# Altium PCB CAN_BUS.PcbDoc
Units mil, origin at the board's own origin, x right, y up, seen from the top; angles counter-clockwise.
Board outline 1210 x 1405 mil, 2 copper layers (Top Layer, Bottom Layer); 16 components, 15 nets, 59 pads, 0 vias.
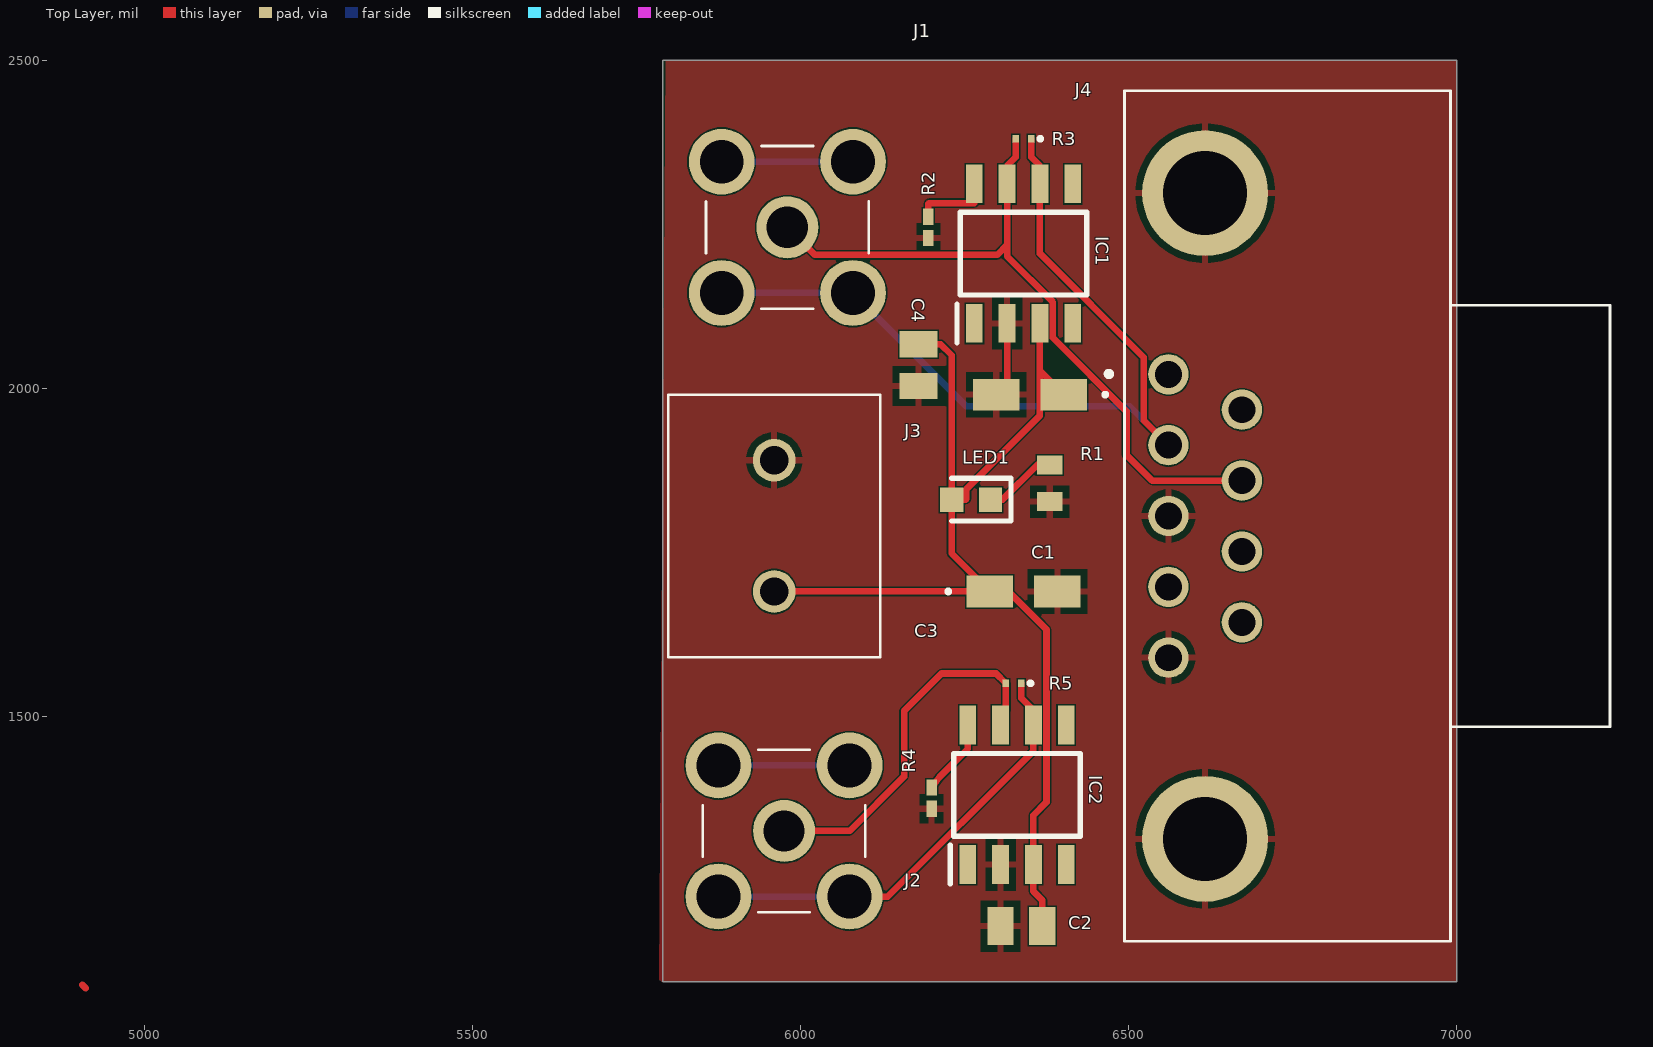
[diagram p0: Top Layer view]
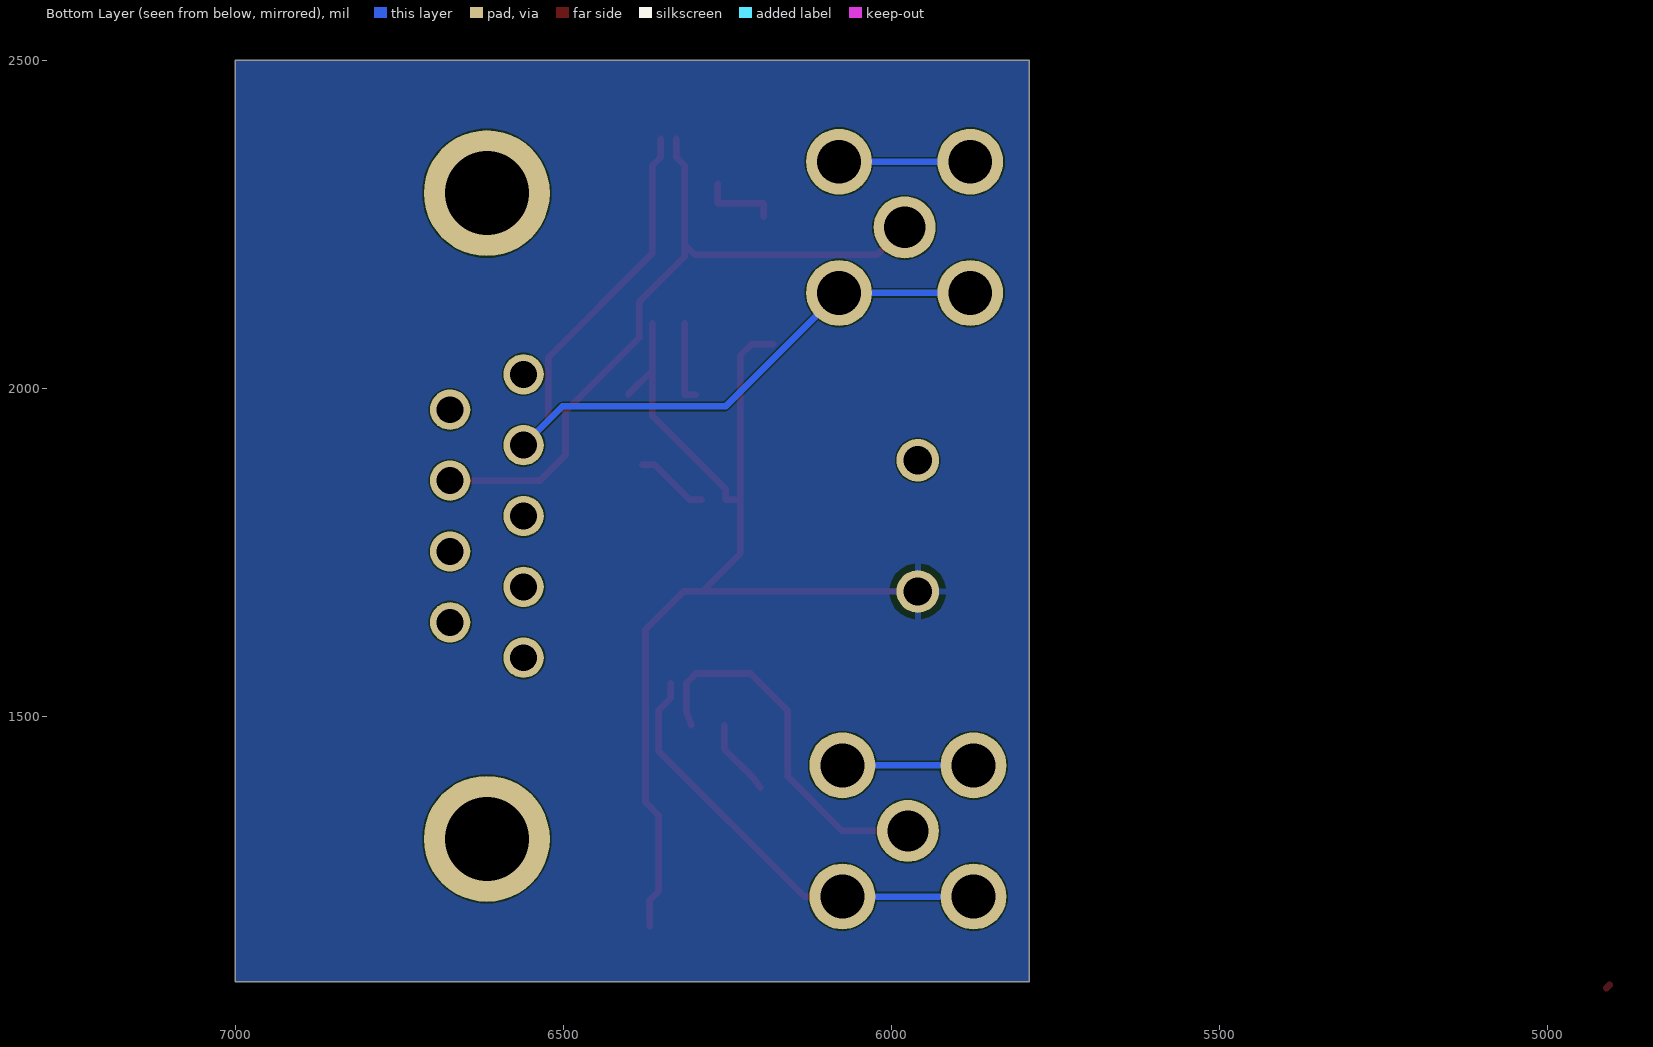
[diagram p1: Bottom Layer view, seen from below]
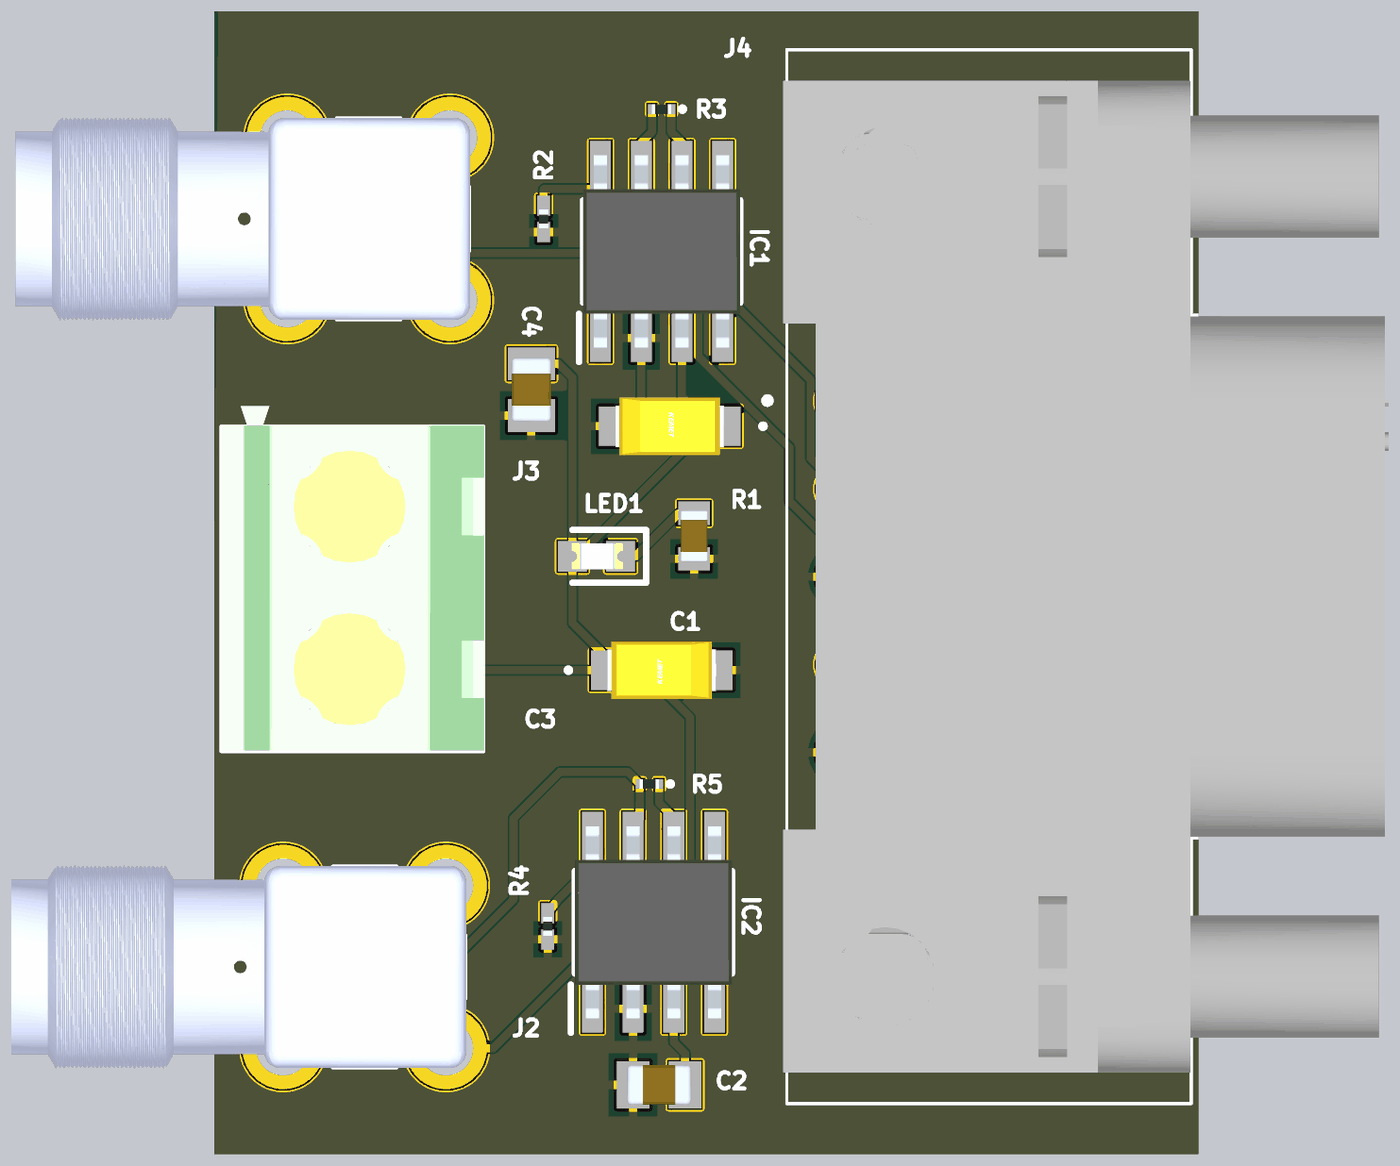
[diagram p2: 3D render of the assembled board from above, using the file's embedded part models]

## Layer stack, top to bottom
Top Solder: solder mask 0.4, Solder Resist, Dk 3.5
Top Layer: signal copper 1.4
Dielectric 1: dielectric 12.6, FR-4, Dk 4.8
Bottom Layer: signal copper 1.4
Bottom Solder: solder mask 0.4, Solder Resist, Dk 3.5

## Board outline
5790,1095 5790,2500 7000,2500 7000,1095

## Design rules (kind name [scope] priority, off if disabled: settings)
Clearance [All] p1: gap=2 ignorepadtopadclearanceinfootprint=FALSE
PolygonConnect [All] p1: connectstyle=Relief reliefconductorwidth=10 reliefentries=4 polygonreliefangle="90 Angle" airgapwidth=10
RoutingVias [All] p1: holewidth=28 width=50 viastyle="Through Hole" minholewidth=28 minwidth=50 maxholewidth=28 maxwidth=50
SolderMaskExpansion [All] p1: expansion=4 istentingtop=FALSE
Width [All] p1: maxlimit=10 minlimit=10 preferedwidth=10
30 further rules are at their usual default settings.

## Components (designator, comment, footprint, x,y, rotation, side; value= is the part's Value field where it differs from the comment)
C1 "T495A226K010ATE1K2" T495A 6340,1690 r0 top
C2 "KGM21AR71E225KU" CAPC2012X135N 6336.89,1180 r0 top
C3 "T495A226K010ATE1K2" T495A 6350,1990 r180 top
C4 "KGM21AR71E225KU" CAPC2012X135N 6180,2035 r90 top
IC1 "MCP2551-I_SN" SOIC127P600X175-8N 6340,2205 r90 top
IC2 "MCP2551-I_SN" SOIC127P600X175-8N 6330,1380 r90 top
J1 "5-1814400-1" 518144001 5980,2245 r90 top
J2 "5-1814400-1" 518144001 5975,1325 r90 top
J3 "282837-2" 2828372 5960,1690 r90 top
J4 "5747844-6" 57478446 6850,1805 r90 top
LED1 "LTST-C190GKT" LEDC1608X90N 6260,1830 r180 top
R1 "CRCW0603330RFKEAHP" CAPC1608X55N 6380,1855 r90 top
R2 "CPF0201D10K2C1" RESC0603X28N 6195,2245 r270 top
R3 "ERJ-1GNF1200C" ERJ1GN_(0201) 6340,2380 r180 top
R4 "CPF0201D10K2C1" RESC0603X28N 6200,1375 r270 top
R5 "ERJ-1GNF1200C" ERJ1GN_(0201) 6325,1550 r180 top

## Footprints (in the part's own frame and the unit in brackets; to place one, negate y for a bottom-side part, rotate by r counter-clockwise, add the part's x,y. Pads: shape width x height; smd on the part's side, far side on the other; paste and mask are expansions set on the pad)
2828372 [mm]
  round 1.65 hole 1.1: 1(0,0) 2(5.08,0)
  silkscreen extent -2.54,-4.1 7.62,4.1, body extent -2.51,-4.11 8.25,4.09, height 9.84
57478446 [mil]
  round 61.5 hole 41: 1(215.98,289.13) 2(107.99,289.13) 3(0,289.13) 4(-107.99,289.13) 5(-215.98,289.13) 6(162.01,177.13) 7(54.02,177.13) 8(-54.02,177.13) 9(-162.01,177.13)
  round 192 hole 128: 10(-492.01,233.11) 11(492.01,233.11)
  silkscreen extent -648,-384 648,384, body extent -610,-383 610,361, height 484
518144001 [mm]
  round 2.4 hole 1.6: 1(0,0)
  round 2.55 hole 1.7: 2(-2.54,2.54) 3(-2.54,-2.54) 4(2.54,-2.54) 5(2.54,2.54)
  silkscreen extent -3.15,-3.15 3.15,3.15, body extent -3.16,-3.17 3.16,11.03, height 10.52
CAPC1608X55N [mm]
  rect 0.73x0.99 smd: 1(-0.71,0) 2(0.71,0)
  body extent -0.8,-0.43 0.8,0.43, height 0.55
CAPC2012X135N [mm]
  rect 1.02x1.47 smd: 1(-0.81,0) 2(0.81,0)
  body extent -1,-0.63 1,0.63, height 1.35
ERJ1GN_(0201) [mm]
  rect 0.25x0.3 smd: 1(-0.3,0) 2(0.3,0)
  silkscreen extent -0.7,-0.05 -0.6,0.05, body extent -0.3,-0.15 0.3,0.15, height 0.23
LEDC1608X90N [mm]
  rect 0.9x0.95 smd: 1(-0.75,0) 2(0.75,0)
  silkscreen extent -1.55,-0.82 0.75,0.82, body extent -0.82,-0.4 0.78,0.4, height 0.8
RESC0603X28N [mm]
  rect 0.625x0.4 smd: 1(-0.412,0) 2(0.412,0)
  body extent -0.29,-0.15 0.29,0.15, height 0.28
SOIC127P600X175-8N [mm]
  rect 1.5x0.65 smd: 1(-2.7,1.905) 2(-2.7,0.635) 3(-2.7,-0.635) 4(-2.7,-1.905) 5(2.7,-1.905) 6(2.7,-0.635) 7(2.7,0.635) 8(2.7,1.905)
  silkscreen extent -3.45,-2.45 1.6,2.58, body extent -3,-2.45 3,2.45, height 1.75
T495A [mm]
  rect 1.8x1.23 smd: 1(-1.31,0) 2(1.31,0)
  silkscreen extent -2.96,-0.05 -2.86,0.05, body extent -1.7,-0.9 1.7,0.9, height 1.81

## Part data
C1 C3: "Capacitor Polarised", Manufacturer_Name=KEMET, Mouser Part Number=80-T495A226K10ATE1K2, Datasheet Link=https://content.kemet.com/datasheets/KEM_T2009_T495.pdf, Height=1.8mm, Manufacturer_Part_Number=T495A226K010ATE1K2, Mouser Price/Stock=https://www.mouser.co.uk/ProductDetail/KEMET/T495A226K010ATE1K2?qs=sSYV1F9c5cELTAm7MEUyXw%3D%3D
C2 C4: "Capacitor", Manufacturer_Name=KYOCERA, Mouser Part Number=581-KGM21AR71E225KU, Datasheet Link=https://pt.mouser.com/ProductDetail/KYOCERA-AVX/KGM21AR71E225KU?qs=sGAEpiMZZMt7gvpyg0xT8jBHDtGZvLzXyjuUdgmQe5tN2DBxA0np4w%3D%3D, Height=1.35mm, Manufacturer_Part_Number=KGM21AR71E225KU, Mouser Price/Stock=https://www.mouser.co.uk/ProductDetail/KYOCERA-AVX/KGM21AR71E225KU?qs=Jm2GQyTW%2FbhCn4KuUMBp1Q%3D%3D
IC1 IC2: "Integrated Circuit", Arrow Part Number=MCP2551-I/SN, Manufacturer_Name=Microchip, Mouser Part Number=579-MCP2551-I/SN, Arrow Price/Stock=https://www.arrow.com/en/products/mcp2551-isn/microchip-technology?region=nac, Datasheet Link=https://datasheet.datasheetarchive.com/originals/distributors/Datasheets-34/DSA-674994.pdf, Height=1.75mm, Manufacturer_Part_Number=MCP2551-I/SN, Mouser Price/Stock=https://www.mouser.co.uk/ProductDetail/Microchip-Technology/MCP2551-I-SN?qs=9y3LFqDLL8L5zFfqqxdOHg%3D%3D
J1 J2: "Connector", Manufacturer_Name="TE Connectivity", Mouser Part Number=571-5-1814400-1, Arrow Part Number=5-1814400-1, Arrow Price/Stock=https://www.arrow.com/en/products/5-1814400-1/te-connectivity, Datasheet Link=https://www.te.com/commerce/DocumentDelivery/DDEController?Action=showdoc&DocId=Customer+Drawing%7F1814400%7FD%7Fpdf%7FEnglish%7FENG_CD_1814400_D_baseFilename.pdf%7F5-1814400-1, Height=10.43mm, Manufacturer_Part_Number=5-1814400-1, Mouser Price/Stock=https://www.mouser.co.uk/ProductDetail/TE-Connectivity/5-1814400-1?qs=ZMVvPt2N%252B83mDSbcJPKgOA%3D%3D
J3: "Connector", Manufacturer_Name="TE Connectivity", Mouser Part Number=571-2828372, Arrow Part Number=282837-2, Arrow Price/Stock=https://www.arrow.com/en/products/282837-2/te-connectivity?region=europe, Datasheet Link=https://www.te.com/commerce/DocumentDelivery/DDEController?Action=srchrtrv&DocNm=282837&DocType=Customer+Drawing&DocLang=English&DocFormat=pdf&PartCntxt=282837-2, Height=10.3mm, Manufacturer_Part_Number=282837-2, Mouser Price/Stock=https://www.mouser.co.uk/ProductDetail/TE-Connectivity/282837-2?qs=A%252Bip%252BNCYi6O2H0NGWOeAxg%3D%3D
J4: "Connector", Manufacturer_Name="TE Connectivity", Mouser Part Number=571-5747844-6, Arrow Part Number=5747844-6, Arrow Price/Stock=https://www.arrow.com/en/products/5747844-6/te-connectivity?region=europe, Datasheet Link=http://www.te.com/commerce/DocumentDelivery/DDEController?Action=showdoc&DocId=Customer+Drawing%7F5747844%7FP%7Fpdf%7FEnglish%7FENG_CD_5747844_P.pdf%7F5747844-6, Height=12mm, Manufacturer_Part_Number=5747844-6, Mouser Price/Stock=https://www.mouser.co.uk/ProductDetail/TE-Connectivity/5747844-6?qs=x6EjVpvqMVNBaI3EeeZZVw%3D%3D
LED1: "LED", Manufacturer_Name=Lite-On, Mouser Part Number=859-LTST-C190GKT, Arrow Part Number=LTST-C190GKT, Arrow Price/Stock=https://www.arrow.com/en/products/ltst-c190gkt/lite-on-technology?region=nac, Datasheet Link=https://media.digikey.com/pdf/Data%20Sheets/Lite-On%20PDFs/LTST-C190GKT.pdf, Height=0.9mm, Manufacturer_Part_Number=LTST-C190GKT, Mouser Price/Stock=https://www.mouser.co.uk/ProductDetail/Lite-On/LTST-C190GKT?qs=drxkyCeiWgbQzclgbojDOg%3D%3D
R1: "Resistor", Manufacturer_Name=Vishay, Mouser Part Number=71-CRCW0603330RFKEAH, Arrow Part Number=CRCW0603330RFKEAHP, Arrow Price/Stock=https://www.arrow.com/en/products/crcw0603330rfkeahp/vishay?region=nac, Datasheet Link=http://uk.rs-online.com/web/p/products/8206830, Height=0.55mm, Manufacturer_Part_Number=CRCW0603330RFKEAHP, Mouser Price/Stock=https://www.mouser.co.uk/ProductDetail/Vishay-Dale/CRCW0603330RFKEAHP?qs=40TFAHZMFve19Cb4zHLgwA%3D%3D
R2 R4: "Resistor", Manufacturer_Name="TE Connectivity", Mouser Part Number=N/A, Datasheet Link=http://www.te.com/commerce/DocumentDelivery/DDEController?Action=showdoc&DocId=Data+Sheet%7F1773200-1%7FA%7Fpdf%7FEnglish%7FENG_DS_1773200-1_A.pdf%7F4-2176215-6, Height=0.28mm, Manufacturer_Part_Number=CPF0201D10K2C1, Mouser Price/Stock=https://www.mouser.com/Search/Refine.aspx?Keyword=N%2FA
R3 R5: "Resistor", Manufacturer_Name=Panasonic, Mouser Part Number=667-ERJ-1GNF1200C, Datasheet Link=https://industrial.panasonic.com/cdbs/www-data/pdf/RDA0000/AOA0000C301.pdf, Height=0.26mm, Manufacturer_Part_Number=ERJ-1GNF1200C, Mouser Price/Stock=https://www.mouser.co.uk/ProductDetail/Panasonic/ERJ-1GNF1200C?qs=nuXzIS8loXGKevQlMTNn0A%3D%3D

## Nets (pads, with @x,y where several pads share a name; then routed paths per layer and width w, separated by ;. In a path a pad name is that pad's centre, name@x,y a point inside that pad or via, vN(x,y) a via of type N, cw(c..) or ccw(c..) an arc to the next point about the centre after c; other vN are vias at no path point)
CAN1_H: IC1.7 J1.1 J4.7 R3.2 | length 1113.5
  Top Layer w10: J1.1 6022,2203 6300,2203 6315,2218 ; R3.2 6328.19,2352.19 6315,2339 IC1.7 6315,2218 ; J4.7 6535.98,1859.02 6496.97,1898.03 6496.97,1964.51 6384.8,2076.68 6384.8,2131.13 6315,2200.92 6315,2218
CAN1_L: IC1.6 J1.2 J1.3 J4.2 R3.1 | length 1330.6
  Top Layer w10: R3.1 6351.81,2352.19 6365,2339 IC1.6 6365,2205 6523,2047 6523,1950.86 J4.2
  Bottom Layer w10: J1.2 J1.3 6253,1972 6501.86,1972 J4.2
CAN1_RX: IC1.4
CAN1_TX: IC1.1
CAN2_H: IC2.7 J2.1 R5.2 | length 632
  Top Layer w10: J2.1 6075,1325 6158,1408 6158,1508 6215,1565 6298.19,1565 6312.28,1550.91 6313.11,1550.91 6313.19,1550.83 R5.2 ; IC2.7@6312.8,1506.17 IC2.7 IC2.7@6312.8,1506.18 ; IC2.7@6313.19,1507.64 cw(c6213.59,1533.62) IC2.7@6312.8,1506.18 ; IC2.7@6313.19,1508.96 R5.2 ; IC2.7@6312.8,1506.18 6312.82,1508.97 R5.2
CAN2_L: IC2.6 J2.2 J2.3 R5.1 | length 682.5
  Top Layer w10: J2.3 6133,1225 6355,1447 IC2.6 6355,1509 6336.81,1527.19 R5.1
  Bottom Layer w10: J2.2 J2.3
CAN2_RX: IC2.4
CAN2_TX: IC2.1
GND: C1.2 C2.1 C3.2 C4.1 IC1.2 IC2.2 J3.2 J4.3 J4.5 J4.10 J4.11 R1.1 R2.2 R4.2 | length 125.3
  Top Layer w10: C3.2 6315,1990 IC1.2
NetIC1_8: IC1.8 R2.1 | length 119.5
  Top Layer w10: R2.1 6195,2280.98 6196,2281.98 6265,2281.98 IC1.8
NetIC2_8: IC2.8 R4.1 | length 116.9
  Top Layer w10: R4.1 6212,1407 6255,1450 IC2.8
NetJ1_4: J1.4 J1.5 | length 200
  Bottom Layer w10: J1.5 J1.4
NetJ2_4: J2.4 J2.5 | length 200
  Bottom Layer w10: J2.5 J2.4
NetLED1_1: LED1.1 R1.2 | length 112.4
  Top Layer w10: LED1.1 6308,1830 6360.95,1882.95 R1.2
VCC: C1.1 C2.2 C3.1 C4.2 IC1.3 IC2.3 J3.1 LED1.2 | length 1735.2
  Top Layer w10: J3.1 C1.1 ; C4.2 6213.58,2066.89 6230.47,2050 LED1.2 ; IC1.3 6365,2026.57 ; C2.2 6368.78,1219 6355,1232.78 IC2.3 6355,1349 6375,1369 6375,1632 6317,1690 C1.1 ; C3.1 6365,2026.57 ; LED1.2 6252,1830 6253,1831 6253,1846 6365,1958 6365,2026.57 ; LED1.2 6230.47,1747.95 C1.1
pads on no net: IC1.5 IC2.5 J4.1 J4.4 J4.6 J4.8 J4.9
copper on no net: | length 8.3
  Top Layer w10: 4905,1090.86 4910.86,1085

## Polygon pours and split planes (outlines as drawn)
GND on Top Layer "GND_L01_P000" (solid, pour order 0): 5795,2500 7000,2500 7000,1095 5785,1095
VCC on Bottom Layer "VCC_L02_P001" (solid, pour order 1): 7000,2500 7000,1095 5785,1095 5790,1100 5790,2500